# EAGLE board TouchpaD (EAGLE 7.2.0)
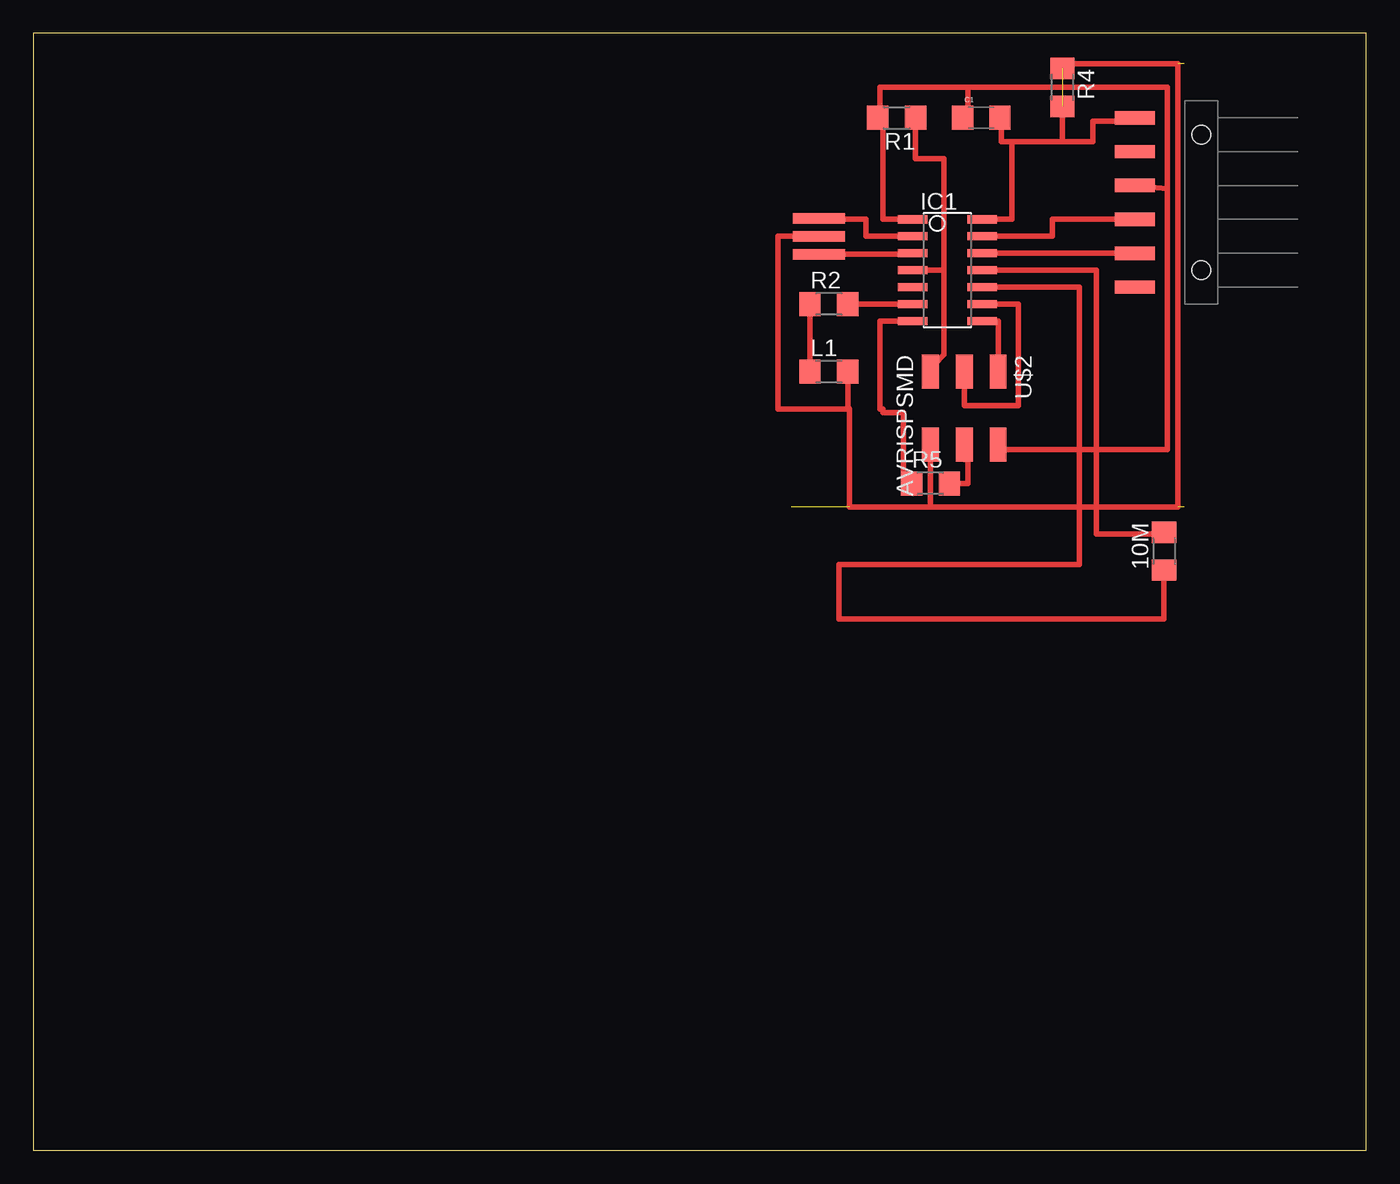
[diagram p0: board, top side]

Size 100 x 83.81 mm. Coordinates in mm from the lower left corner, seen from the top.
Outline: 0,0 100,0 100,83.81 0,83.81 0,0
Copper layers (1*16): Top 0.035mm / dielectric 1.5mm / Bottom 0.035mm
Design rules "default": minimum track width 10mil, minimum drill 24mil, track to track 8mil, track to pad 8mil, pad to pad 8mil, via to via 8mil, smd to smd 8mil, copper to edge 40mil, drill to drill 8mil, minimum pad ring 10mil, minimum via ring 8mil, stop-mask expansion 4mil, vias tented up to drill 0mil, thermal gap 10mil

## Footprints (pad centres in the part's own frame; a part is rotated, then mirrored left to right if it is on the bottom)
1206 = smd 1.6 x 1.803: 1 -1.422,0; 2 1.422,0
1206' = smd 1.6 x 1.8: 1 -1.4,0; 2 1.4,0
SOIC14 = smd 0.61 x 2.21: 1 -3.81,-2.603; 2 -2.54,-2.603; 3 -1.27,-2.603; 4 0,-2.603; 5 1.27,-2.603; 6 2.54,-2.603; 7 3.81,-2.603; 8 3.81,2.603; 9 2.54,2.603; 10 1.27,2.603; 11 0,2.603; 12 -1.27,2.603; 13 -2.54,2.603; 14 -3.81,2.603
1X06-SMD = smd 1 x 3: 1 -6.35,5; 2 -3.81,5; 3 -1.27,5; 4 1.27,5; 5 3.81,5; 6 6.35,5 | hole 1.4: -5.08,0; 5.08,0
EFOBM = smd 0.8 x 3.9: 1 -1.35,0; 2 0,0; 3 1.35,0
2X03SMD = smd 2.54 x 1.27: 1 -2.54,2.54; 2 2.92,2.54; 3 -2.54,0; 4 2.92,0; 5 -2.54,-2.54; 6 2.92,-2.54

## Placement (x,y rotation side)
10M  [1206]  84.84,44.96 90 top
C1  1UF  [1206']  71.12,77.47 0 top
IC1  ATTINY44-SSU  [SOIC14]  68.58,66.04 270 top
JP2  [1X06-SMD]  87.63,71.12 90 top
L1  [1206]  59.69,58.42 0 top
R1  10K  [1206]  64.77,77.47 180 top
R2  500  [1206]  59.69,63.5 0 top
R4  0.0  [1206]  77.22,79.76 270 top
R5  0.0  [1206]  67.31,50.04 0 top
U$1  RESONATOR  [EFOBM]  58.93,68.58 270 top
U$2  AVRISPSMD  [2X03SMD]  69.85,55.88 270 top

## Library data of the parts
10M IC1 L1 R1 R2 R4 R5 U$2 = 01_FAB_Hello
C1 JP2 = 01_SparkFun
U$1 = 01_fab

## Nets
CTS: JP2.5
GND: C1.2 IC1.14 JP2.6 L1.2 R4.1 R4.2 U$1.2 U$2.6
LED: IC1.6 R2.2
MISO: IC1.8 U$2.1
MOSI: R5.2 U$2.4
N$1: IC1.2 U$1.1
N$2: L1.1 R2.1
N$3: IC1.3 U$1.3
N$5: IC1.7 R5.1
RESPONSE: 10M.2 IC1.11
RST: IC1.4 R1.1 U$2.5
RTS: JP2.1
RX: IC1.12 JP2.2
SCK: IC1.9 U$2.3
STEP: 10M.1 IC1.10
TX: IC1.13 JP2.3
VCC: C1.1 IC1.1 JP2.4 R1.2 U$2.2

## Tracks (layer width: path | path; a pad name or v marks a point on that pad's centre or on a via)
GND  (4 unrouted)
  Top 0.406: 67.31,48.26 85.85,48.26 85.85,81.53 77.22,81.53 R4.1 | 67.31,48.26 U$2.6 | 61.21,55.63 61.11,55.73 L1.2 | C1.2 72.64,77.47 72.64,75.69 73.41,75.69 | 73.41,75.69 77.22,75.69 | JP2.6 82.63,77.22 79.5,77.22 79.5,75.69 77.22,75.69 | 73.41,75.69 73.41,69.85 IC1.14 | 77.22,75.69 R4.2 | 67.31,48.26 61.21,48.26 61.21,55.63 | U$1.2 55.88,68.58 55.88,55.63 61.21,55.63
LED
  Top 0.406: R2.2 IC1.6
MISO
  Top 0.406: 71.12,62.23 IC1.8 72.39,62.23 U$2.1 72.39,58.67
MOSI
  Top 0.406: R5.2 70.1,50.04 70.1,51.82 69.85,51.82 U$2.4
N$1
  Top 0.406: U$1.1 59.69,69.85 62.48,69.85 62.48,68.58 IC1.2
N$2
  Top 0.406: R2.1 L1.1
N$3
  Top 0.406: U$1.3 65.98,67.23 IC1.3
N$5
  Top 0.406: R5.1 65.28,50.04 65.28,55.37 63.75,55.37 63.75,55.63 63.5,55.63 63.5,62.23 IC1.7
RESPONSE
  Top 0.406: IC1.11 79.76,66.04 79.76,46.23 84.84,46.23 10M.2
RST
  Top 0.406: U$2.5 67.31,58.93 67.56,58.93 68.33,59.69 68.33,66.04 | IC1.4 68.33,66.04 | 68.33,66.04 68.33,74.42 66.19,74.42 R1.1
RX
  Top 0.406: JP2.2 IC1.12
SCK
  Top 0.406: 69.6,58.42 U$2.3 69.85,55.88 73.91,55.88 73.91,63.5 IC1.9
STEP
  Top 0.406: IC1.10 78.49,64.77 78.49,43.94 60.45,43.94 60.45,39.88 84.84,39.88 10M.1
TX
  Top 0.406: IC1.13 76.45,68.58 76.45,69.85 JP2.3
VCC
  Top 0.406: 85.09,72.14 85.09,79.76 70.1,79.76 | 85.09,72.14 85.09,60.71 85.09,52.58 72.39,52.58 U$2.2 72.52,53.09 | R1.2 63.25,77.47 | R1.2 63.75,77.47 63.75,69.85 IC1.1 | 69.85,77.47 C1.1 70.1,77.47 70.1,79.76 | R1.2 63.5,77.47 63.5,79.76 70.1,79.76 | 85.09,72.14 JP2.4